# Altium PCB BABYCAR2.0_PROJ.PcbDoc
Units mm, origin at the board's own origin, x right, y up, seen from the top; angles counter-clockwise.
Board outline 70 x 26.53 mm, 2 copper layers (Top Layer, Bottom Layer); 11 components, 0 nets, 45 pads, 0 vias.
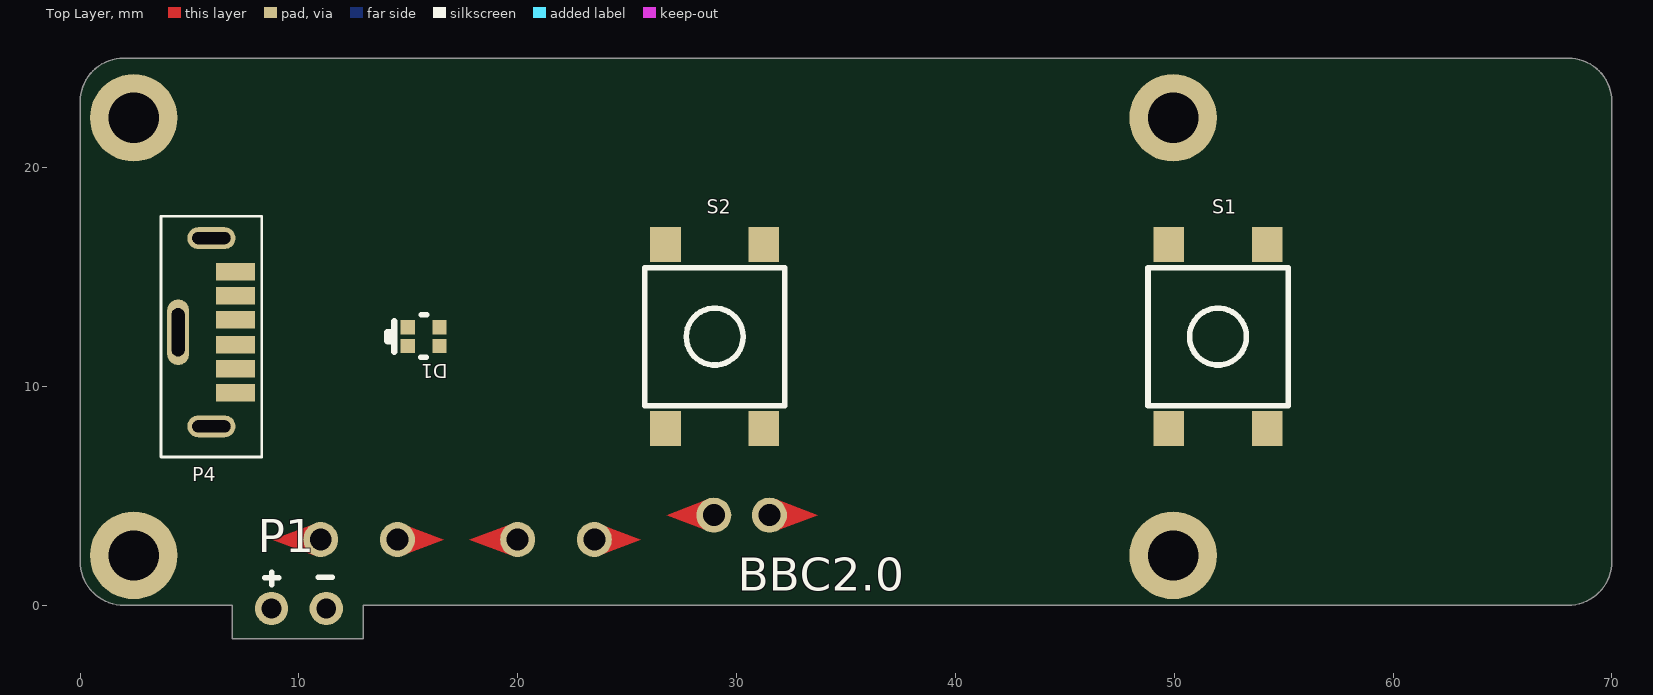
[diagram p0: Top Layer view]
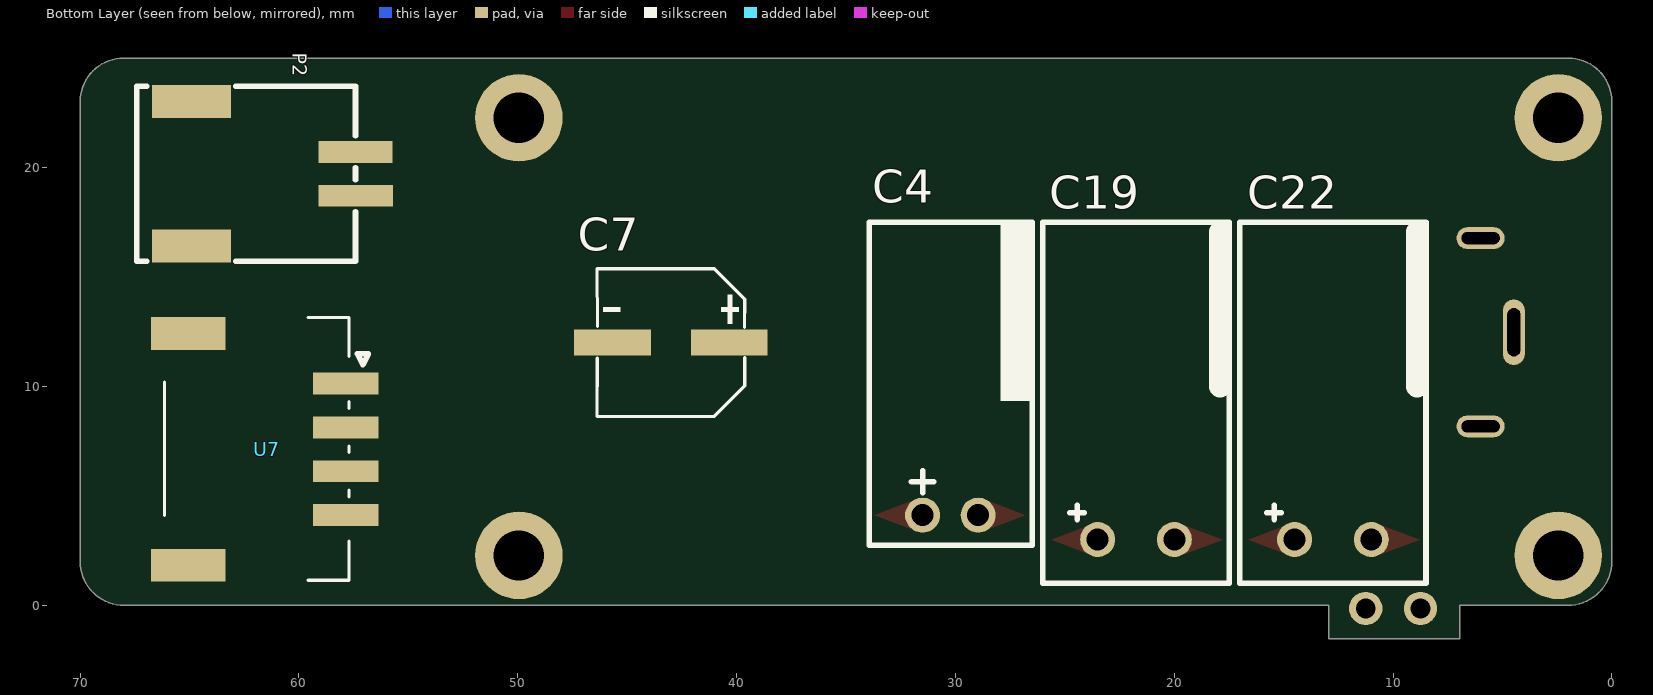
[diagram p1: Bottom Layer view, seen from below]

## Layer stack, top to bottom
Top Solder: solder mask 0.0102, Solder Resist, Dk 3.5
Top Layer: signal copper 0.0356
Dielectric 1: dielectric 0.32, FR-4, Dk 4.8
Bottom Layer: signal copper 0.0356
Bottom Solder: solder mask 0.0102, Solder Resist, Dk 3.5

## Board outline
2,0 cw(c2,2) 0,2 0,23 cw(c2,23) 2,25 68,25 cw(c68,23) 70,23 70,2 cw(c68,2) 68,0 12.949,0 12.949,-1.529 6.949,-1.529 6.949,0

## Design rules (kind name [scope] priority, off if disabled: settings)
Clearance [All] p1: gap=0.254 ignorepadtopadclearanceinfootprint=FALSE except(0: Arc-Hole Track-Hole SMDPad-Hole THPad-Hole Via-Hole Fill-Hole Poly-Hole Region-Hole Text-Hole)
PolygonConnect [All] p1: connectstyle=Relief reliefconductorwidth=0.254 reliefentries=4 polygonreliefangle="90 Angle" airgapwidth=0.254
RoutingVias [All] p1: holewidth=0.711 width=1.27 viastyle="Through Hole" minholewidth=0.711 minwidth=1.27 maxholewidth=0.711 maxwidth=1.27
SolderMaskExpansion [All] p1: expansion=0.102 istentingtop=FALSE
Width [All] p1: maxlimit=0.254 minlimit=0.254 preferedwidth=0.254
30 further rules are at their usual default settings.

## Classes and differential pairs
component class 01-Overview: Logo1 Logo_UL1

## Components (designator, comment, footprint, x,y, rotation, side; value= is the part's Value field where it differs from the comment)
C4 "47uF 63V ±20%" CAP-TH_BD6.3-P2.50-D1.0-WD 31.5,4.114 r180 bottom locked
C7 "220uF 10V ±20%" CAP-SMD_BD6.3-L6.6-W6.6-LS7.4-FD 43,12 r0 bottom locked
C19 "100uF 63V ±20%" CAP-TH_BD8-P3.50-D1.0-WD 23.5,3 r180 bottom locked
C22 "100uF 63V ±20%" CAP-TH_BD8-P3.50-D1.0-WD 14.5,3 r180 bottom locked
D1 "XL-1615SURUWC" LED-SMD_4P-L1.6-W1.5-RD_XL-1615SURUWC 15.699,12.271 r0 top locked
P1 "CX2.5-2P" CX2.5-2P 8.75,-0.15 r0 top locked
P2 "HY2.0" CONN-SMD_HY2.0-2P 61.163,19.71 r270 bottom locked
P4 "USB-C-6P" "USB-C-SMD_KH-TYPE-C-6P -L" 6,16.771 r270 top locked
S1 "Switch_SMD" SMD-4_6X6 52,12.271 r90 top locked
S2 "Switch_SMD" SMD-4_6X6 29,12.271 r90 top locked
U7 "2.00-4P" CONN-SMD_4P-P2.00 62.589,14.135 r270 bottom locked

## Footprints (in the part's own frame and the unit in brackets; to place one, negate y for a bottom-side part, rotate by r counter-clockwise, add the part's x,y. Pads: shape width x height; smd on the part's side, far side on the other; paste and mask are expansions set on the pad)
CAP-SMD_BD6.3-L6.6-W6.6-LS7.4-FD [mm]
  rect 3.5x1.2 smd: 1(-2.67,0) 2(2.67,0)
  silkscreen extent -3.38,-3.38 3.38,3.38, body extent -3.65,-3.3 3.65,3.3, height 5.9
CAP-TH_BD6.3-P2.50-D1.0-WD [mm]
  round 1.6 hole 1: 1(0,0) 2(2.54,0)
  Bottom Layer region: 2.81,-0.718 4.699,-0.001 2.81,0.718
  Bottom Layer region: -0.31,0.718 -2.199,0.001 -0.31,-0.718
  silkscreen extent -2.44,-1.37 5,13.39, body extent -1.88,-1.2 4.42,13, height 6.35
CAP-TH_BD8-P3.50-D1.0-WD [mm]
  round 1.6 hole 1: 1(0,0) 2(3.505,0)
  Bottom Layer region: 3.82,-0.728 5.709,-0.011 3.82,0.708
  Bottom Layer region: -0.24,0.708 -2.129,-0.009 -0.24,-0.728
  silkscreen extent -2.5,-2 6.01,14.5, body extent -2.27,-1.27 5.73,14.33, height 8.1
CONN-SMD_4P-P2.00 [mm]
  rect 1x3 smd paste+0 mask+0.05: 1(4.013,4.728) 2(6.013,4.728) 3(8.013,4.728) 4(10.013,4.728)
  rect 1.5x3.4 smd paste+0 mask+0.05: 5(1.713,-2.472) 6(12.313,-2.472)
  silkscreen extent 0.99,-3.56 12.99,5.77
CONN-SMD_HY2.0-2P [mm]
  rect 1.5x3.6 smd: 0(-3.3,-3.751) 0(3.3,-3.751)
  rect 1x3.4 smd: 1(-1,3.749) 2(1.001,3.751)
  silkscreen extent -4,-6.25 4,3.75, body extent -3.97,-6.38 4.03,2.22, height 5.6
CX2.5-2P [mil]
  round 60 hole 35.43: 1(0,0) 2(98.43,0)
  silkscreen extent -12,42 109,65
LED-SMD_4P-L1.6-W1.5-RD_XL-1615SURUWC [mm]
  rect 0.65x0.65 smd: 1(-0.725,0.425) 2(0.725,0.425) 3(-0.725,-0.425) 4(0.725,-0.425)
  silkscreen extent -1.65,-0.95 0.15,1, body extent -0.8,-0.75 0.8,0.75, height 0.34
SMD-4_6X6 [mm]
  rect 1.6x1.4 smd: 1(-4.2,2.249) 2(4.2,2.249) 3(-4.2,-2.249) 4(4.2,-2.249)
  silkscreen extent -3.15,-3.2 3.15,3.2, body extent -4.25,-3.3 4.25,3.3, height 5
"USB-C-SMD_KH-TYPE-C-6P -L" [mm]
  oval 1x2.2 hole 0.55 slot 1.75 at 90 deg: 1(0,0) 1(8.6,0)
  oval 3x1 hole 0.6 slot 2.2 at 0 deg: 2(4.3,-1.52)
  rect 0.8x1.8 smd: A5(3.73,1.1) A9(5.97,1.1) A12(7.07,1.1) B5(4.87,1.1) B9(2.63,1.1) B12(1.53,1.1)
  silkscreen extent -1,-2.3 10,2.3

## Part data
C4 C7 C19 C22: library part Cap_elec, "电解电容"
D1: "0603封装的红白黄色LED"
P1: "磁吸端子 弯插 2pin 2.5针距"
P2: library part "Header 2", "连接器, 2-Pin"
P4: "6Pin USB Type-C 接口"
S1 S2: library part Switch_SMD_4P, "4PIN按键开关"
U7: library part 2.00-4PWTDK, "连接器4pin，2.00间距", Current Rating (Max)=1A, JLCPCB Part Class="Extended Part", LCSC Part Name="1.25间距 4P卧贴 带扣", MANUFACTURER="SHOU HAN(首韩)", Manufacturer Part=1.25-4PWTDK, Operating Temperature Range=-25℃~+85℃, Add into BOM=yes, Convert to PCB=yes, Datasheet=https://atta.szlcsc.com/upload/public/pdf/source/20220427/006CB3E3578F619E540A50F8B0C3F638.pdf, DEVICE=1.25-4PWTDK, Gender=公型插针, Mounting Style=卧贴, Name=1.25-4PWTDK, Number of PINs Per Row=4, Number of Rows=1, Pins Structure=1x4P, Pitch=1.25mm, Supplier=LCSC, Supplier Footprint=SMD,P=1.25mm, Supplier Part=C3008554, Symbol=1.25-4PWTDK

## Free pads (board coordinates)
  round 4 hole 2.3: 7(2.449,2.271) 7(2.449,22.271) 7(49.949,2.271) 7(49.949,22.271)

## Nets (pads, with @x,y where several pads share a name; then routed paths per layer and width w, separated by ;. In a path a pad name is that pad's centre, name@x,y a point inside that pad or via, vN(x,y) a via of type N, cw(c..) or ccw(c..) an arc to the next point about the centre after c; other vN are vias at no path point)
pads on no net: C4.1 C4.2 C7.1 C7.2 C19.1 C19.2 C22.1 C22.2 D1.1 D1.2 D1.3 D1.4 P1.1 P1.2 P2.0 P2.1 P2.2 P4.1 P4.2 P4.A5 P4.A9 P4.A12 P4.B5 P4.B9 P4.B12 S1.1 S1.2 S1.3 S1.4 S2.1 S2.2 S2.3 S2.4 U7.1 U7.2 U7.3 U7.4 U7.5 U7.6

## Silkscreen, mask and mechanical layers (free items; w line width, h text height)
Top Overlay:
  text "BBC2.0" at 30.048,0.66 h1.52
Mechanical 1:
  the board outline again, w0.254